# EAGLE board Driver (EAGLE 9.4.2)
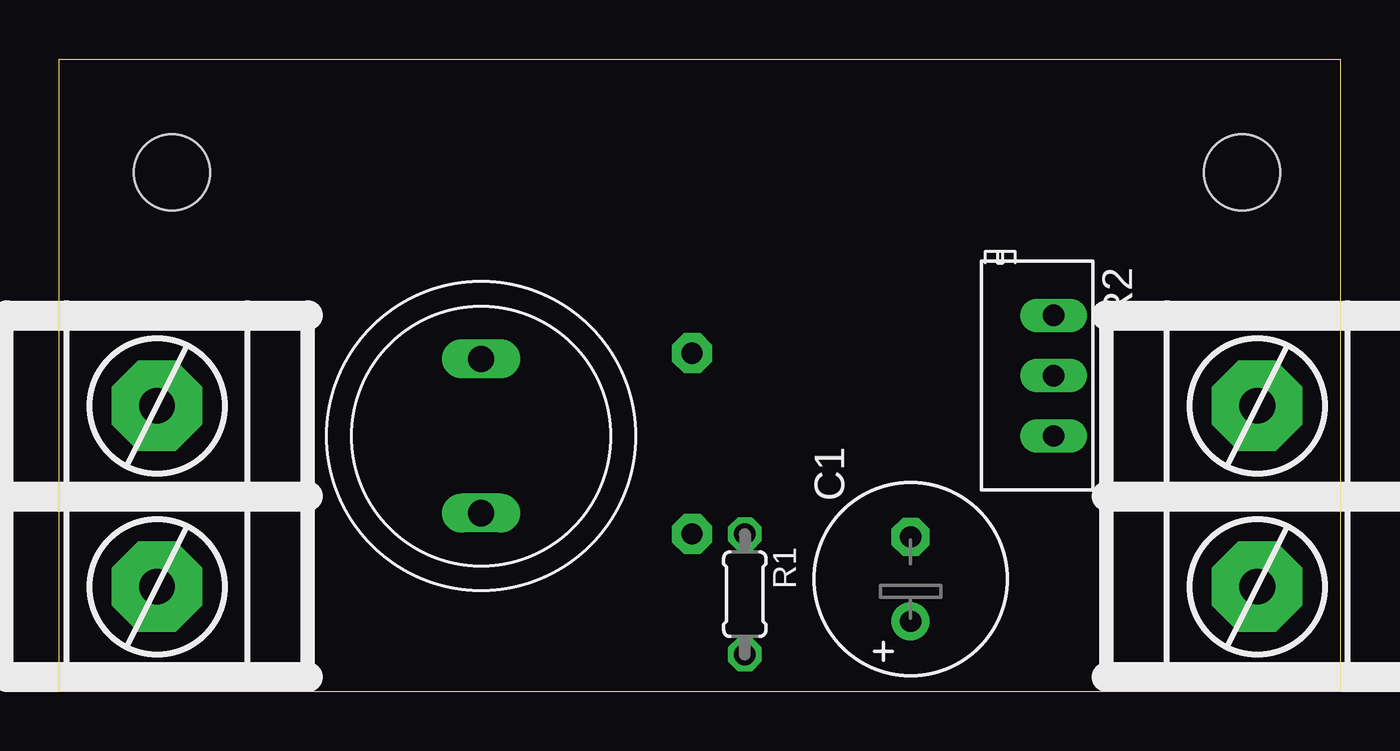
[diagram p0: board, top side]
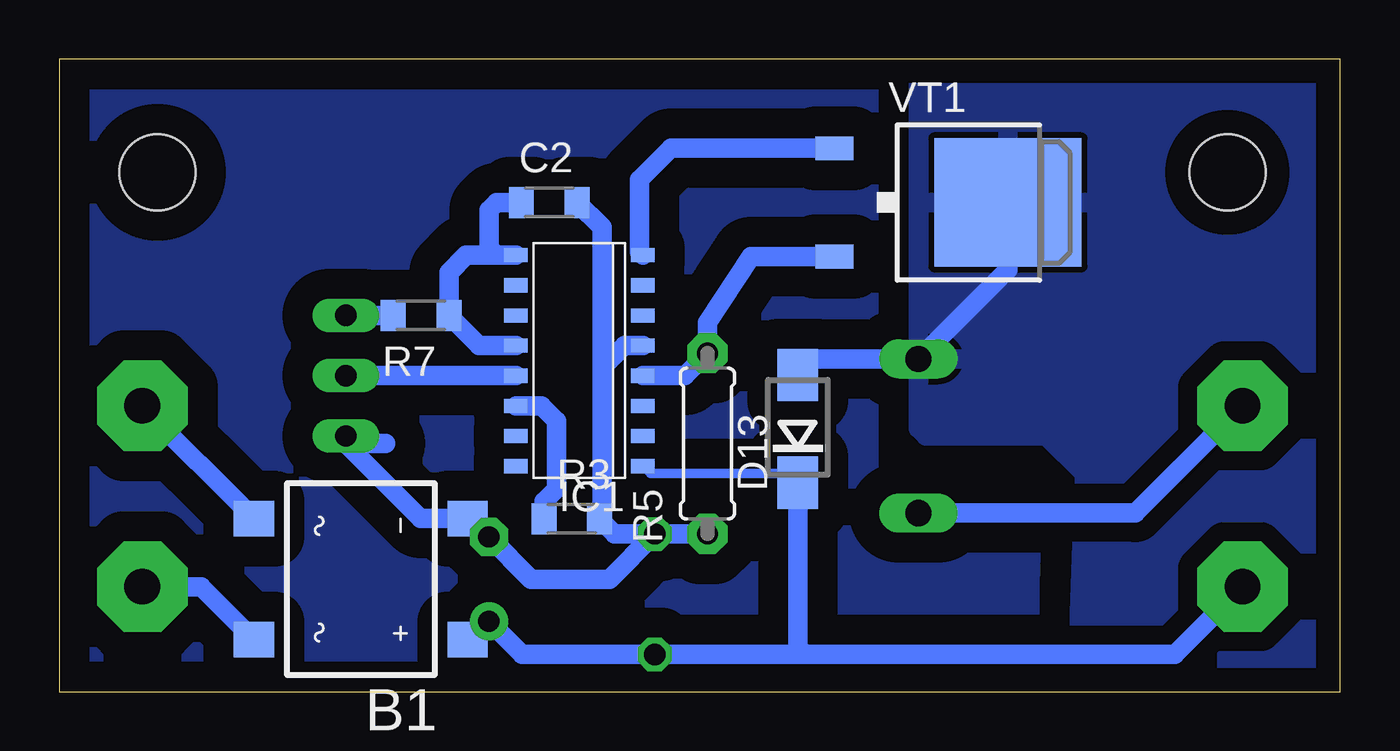
[diagram p1: board, bottom side, seen from below]

Size 53.96 x 26.65 mm. Coordinates in mm from the lower left corner, seen from the top.
Outline: 53.96,26.65 53.96,0 0,0 0,26.65 53.96,26.65
Copper layers (1*16): Top 0.035mm / dielectric 1.5mm / Bottom 0.035mm
Design rules "default": minimum track width 6mil, minimum drill 0.35mm, track to track 6mil, track to pad 6mil, pad to pad 6mil, via to via 6mil, smd to smd 6mil, copper to edge 40mil, drill to drill 6mil, minimum pad ring 10mil, minimum via ring 8mil, stop-mask expansion 4mil, vias tented up to drill 0mil, thermal gap 10mil
Holes 3.2 mm at 49.84,21.89 4.75,21.89

## Footprints (pad centres in the part's own frame; a part is rotated, then mirrored left to right if it is on the bottom)
DFS = smd 1.5 x 1.7: + -2.55,-4.5; - 2.55,-4.5; AC1 -2.55,4.5; AC2 2.55,4.5
E3,5-8 = drill 0.9 pad 1.6: + -1.778,0 | drill 0.9 pad 1.6 octagon: - 1.778,0
C0805 = smd 1.05 x 1.3: 1 -1.175,0; 2 1.175,0
DO214AC = smd 2.2 x 1.7: A 2.25,0; C -2.285,0
SOIC-16NG = smd 0.6 x 1: 1 -4.445,-2.675; 2 -3.175,-2.675; 3 -1.905,-2.675; 4 -0.635,-2.675; 5 0.635,-2.675; 6 1.905,-2.675; 7 3.175,-2.675; 8 4.445,-2.675; 9 4.445,2.675; 10 3.175,2.675; 11 1.905,2.675; 12 0.635,2.675; 13 -0.635,2.675; 14 -1.905,2.675; 15 -3.175,2.675; 16 -4.445,2.675
SL1016 = drill 1.1 long: P$1 3.25,0; P$2 -3.25,0
MF-0125 = drill 0.9 octagon: 1 -2.54,0; 2 2.54,0
RJ9W = drill 0.9 long: A 2.54,0.635; B -2.54,0.635; W 0,0.635
R0805 = smd 1.05 x 1.3: 1 -1.175,0; 2 1.175,0
MF-025 = drill 0.9 pad 1.676 octagon: 1 -3.81,0; 2 3.81,0
DPAK = smd 5.4 x 6.2: D 0,2.5 | smd 1 x 1.6: G -2.28,-4.8; S 2.28,-4.8
KF25C-7.62-02P-13 = drill 1.5 pad 3.81 octagon: P$1 -3.81,0; P$2 3.81,0

## Placement (x,y rotation side)
B1  B8S  [DFS]  41.26,4.74 90 bottom
C1  400v 22u  [E3,5-8]  35.87,4.74 90 top
C2  1u  [C0805]  33.33,20.62 0 bottom
D13  ES1J  [DO214AC]  22.85,11.09 90 bottom
IC1  HV9961NG-G  [SOIC-16NG]  32.05,13.95 90 bottom
L1  SL1016T  [SL1016]  17.77,10.78 90 top
R1  160K  [MF-0125]  28.88,4.11 270 top
R2  [RJ9W]  41.26,13.32 270 top
R3  62K  [R0805]  32.37,7.28 0 bottom
R5  2R7  [MF-025]  26.66,10.46 90 bottom
R7  39K  [R0805]  38.72,15.86 180 bottom
VT1  STD1NK60T4  [DPAK]  16.5,20.62 270 bottom
X1  CON-7.62-02P  [KF25C-7.62-02P-13]  50.47,8.24 90 top
X2  CON-7.62-02P  [KF25C-7.62-02P-13]  4.12,8.24 90 top

## Library data of the parts
B1 = rectifier
C1 C2 D13 L1 R1 R3 R7 VT1 X1 X2 = Namenlos
IC1 = Namenlos; OC_FARNELL: unknown; OC_NEWARK: unknown
R2 R5 = Flamberm

## Nets
N$2: R2.B R7.2
N$3: C2.1 IC1.9 IC1.12 R7.1
N$12: B1.AC1 X1.P$1
N$13: B1.AC2 X1.P$2
N$14: B1.- C1.- C2.2 IC1.5 R1.1 R2.A R3.2 R5.1
N$15: IC1.13 R2.W
N$17: B1.+ C1.+ D13.C IC1.1 R1.2 X2.P$1
N$19: IC1.4 R5.2 VT1.S
N$20: IC1.14 R3.1
N$21: IC1.8 VT1.G
N$22: L1.P$2 X2.P$2
N$23: D13.A L1.P$1 VT1.D

## Tracks (layer width: path | path; a pad name or v marks a point on that pad's centre or on a via)
N$1
  pour Bottom (isolate 1.27, rank 6): -0.01,26.65 53.96,26.65 53.96,-0.02 -0.01,-0.02
N$2
  Bottom 0.813: R7.2 R2.B
N$3
  Bottom 0.813: IC1.9 35.55,18.39 | 35.55,18.39 35.86,18.71 35.86,20.3 35.55,20.62 C2.1 | IC1.12 36.28,14.59 R7.1 37.55,17.66 36.82,18.39 35.55,18.39
N$12
  Bottom 0.813: B1.AC1 48,4.43 X1.P$1
N$13
  Bottom 0.813: B1.AC2 50.47,12 X1.P$2
N$14
  Bottom 0.813: IC1.5 30.15,14.59 31.1,13.63 | 31.1,13.63 31.1,7.38 R3.2 30.56,6.65 R1.1 | 31.1,13.63 31.1,19.57 C2.2 | R1.1 30.78,4.74 34.09,4.74 C1.- 35.99,6.52 B1.- 38.73,7.29 41.9,10.46 | R5.1 R1.1 | 41.9,10.46 R2.A | 40.22,10.46 41.9,10.46
N$15
  Bottom 0.813: 35.86,13.32 IC1.13 R2.W
N$17
  Bottom 0.406: IC1.1 29.06,9.19 23.23,9.19
  Bottom 0.813: B1.+ 36.64,2.19 C1.+ 34.47,1.57 R1.2 22.54,1.57 | X2.P$1 6.97,1.57 22.54,1.57 | 22.54,1.57 22.85,1.88 D13.C 23.23,9.19
N$19
  Bottom 0.813: VT1.S 24.82,18.34 26.66,15.56 R5.2 27.61,13.32 IC1.4
N$20
  Bottom 0.813: R3.1 33.55,8.01 33.01,8.55 33.01,11.41 33.64,12.04 IC1.14
N$21
  Bottom 0.813: VT1.G 28.19,22.9 29.52,21.57 29.52,18.53 IC1.8
N$22
  Bottom 0.813: X2.P$2 8.63,7.53 L1.P$2
N$23
  Bottom 0.813: VT1.D 14,17.8 L1.P$1 22.17,14.03 D13.A
  pour Bottom (isolate 0.813): 17.77,26.65 17.77,11.09 17.45,10.78 12.37,10.78 10.78,9.19 11.1,0.3 11.74,-0.02 0.62,-0.02 -0.01,0.61 -0.01,26.02 0.62,26.65